# Altium PCB Range_Front.PcbDoc
Units mil, origin at the board's own origin, x right, y up, seen from the top; angles counter-clockwise.
Board outline 420 x 340 mil, 2 copper layers (Top Layer, Bottom Layer); 4 components, 6 nets, 22 pads, 2 vias.
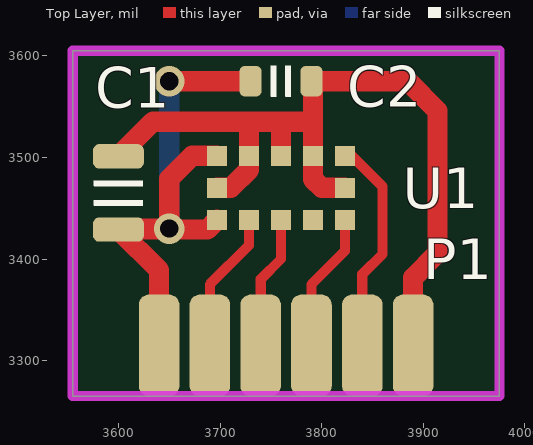
[diagram p0: Top Layer view]
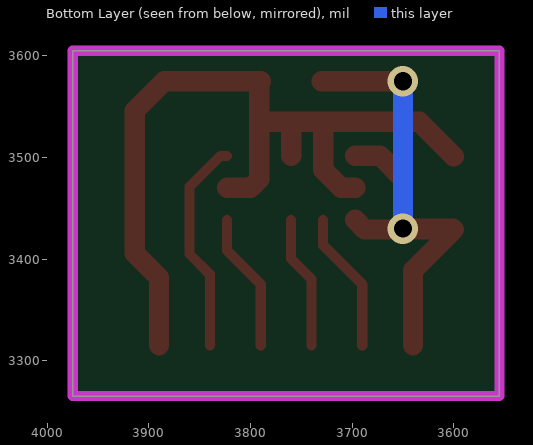
[diagram p1: Bottom Layer view, seen from below]

## Layer stack, top to bottom
Top Solder: solder mask 0.4, Solder Resist, Dk 3.5
Top Layer: signal copper 1.4
Dielectric 1: dielectric 12.6, FR-4, Dk 4.8
Bottom Layer: signal copper 1.4
Bottom Solder: solder mask 0.4, Solder Resist, Dk 3.5

## Board outline
3555,3265 3555,3605 3975,3605 3975,3265

## Design rules (kind name [scope] priority, off if disabled: settings)
Clearance Clearance_KeepOut [OnLayer('Keep-Out Layer')] p1: gap=8 ignorepadtopadclearanceinfootprint=TRUE except(0: Arc-SMDPad Arc-Hole Track-SMDPad Track-Hole SMDPad-Hole THPad-Hole Via-Hole Fill-Hole Poly-Hole Region-Hole Text-Hole)
Clearance [All] p2: gap=8 ignorepadtopadclearanceinfootprint=TRUE except(0: Arc-Hole Track-Hole SMDPad-Hole THPad-Hole Via-Hole Fill-Hole Poly-Hole Region-Hole Text-Hole)
ComponentClearance [All] p1: gap=8 collisioncheckmode=3 verticalgap=8 showdistances=FALSE
PolygonConnect [All] p1: connectstyle=Relief reliefconductorwidth=10 reliefentries=4 polygonreliefangle="90 Angle" airgapwidth=10
RoutingVias [All] p1: holewidth=18 width=30 viastyle="Through Hole" minholewidth=13 minwidth=20 maxholewidth=18 maxwidth=30
SolderMaskExpansion [All] p1: expansion=4
Width Width_VCC [InNet('VCC2.8V')] p1: maxlimit=30 minlimit=10 preferedwidth=20 minimp=50.000000 maximp=50.000000 favimp=50.000000
Width Width_GND [InNet('GND')] p2: maxlimit=30 minlimit=10 preferedwidth=20 minimp=50.000000 maximp=50.000000 favimp=50.000000
Width [All] p3: maxlimit=10 minlimit=10 preferedwidth=10
29 further rules are at their usual default settings.

## Components (designator, comment, footprint, x,y, rotation, side; value= is the part's Value field where it differs from the comment)
C1 "Cap_0805" CAP_0805 3600,3465 r270 top value=10uF
C2 "Cap_0603" CAP_0603 3760,3575 r180 top value=0.1uF
P1 "HDR1x6_1.27" HDR1X6_1.27_180H_SMD 3640,3315 r270 top
U1 "VL53L0X" LGA12_ST_4.4X2.4X1MM 3760,3470 r180 top

## Footprints (in the part's own frame and the unit in brackets; to place one, negate y for a bottom-side part, rotate by r counter-clockwise, add the part's x,y. Pads: shape width x height; smd on the part's side, far side on the other; paste and mask are expansions set on the pad)
CAP_0603 [mil]
  rrect50% 22x30 smd: 1(-30,0) 2(30,0)
  silkscreen extent -10,-15 10,15, body extent -31,-16 31,16, height 31
CAP_0805 [mil]
  rrect50% 24x50 smd: 1(-36,0) 2(36,0)
  silkscreen extent -12,-24 12,24, body extent -39,-25 39,25, height 39
HDR1X6_1.27_180H_SMD [mil]
  rrect50% 100x40 smd: 1(0,0) 2(0,50) 3(0,100) 4(0,150) 5(0,200) 6(0,250)
LGA12_ST_4.4X2.4X1MM [mil] "VL53L0X, LGA12 4.4X2.4X1MM"
  rect 19.69x19.69 smd: 1(62.99,-31.5) 2(31.5,-31.5) 3(0,-31.5) 4(-31.5,-31.5) 5(-62.99,-31.5) 6(-62.99,0) 7(-62.99,31.5) 8(-31.5,31.5) 9(0,31.5) 10(31.5,31.5) 11(62.99,31.5) 12(62.99,0)

## Part data
C1 C2: "Capacitor"
P1: "Header"
U1: "VL53L0X - Laser Time of Flight Sensor (2M range)", VDD="VDD:  / Op. Temp:"

## Via types
v1: diameter 30, hole 18, Top Layer to Bottom Layer, 2 vias

## Nets (pads, with @x,y where several pads share a name; then routed paths per layer and width w, separated by ;. In a path a pad name is that pad's centre, name@x,y a point inside that pad or via, vN(x,y) a via of type N, cw(c..) or ccw(c..) an arc to the next point about the centre after c; other vN are vias at no path point)
GND: C1.1 C2.1 P1.6 U1.2 U1.3 U1.4 U1.6 U1.12 | length 829.2
  Top Layer w20: C1.1 3634,3535 3725,3535 ; U1.12 3710.66,3470 3728.5,3487.84 U1.2 3728.5,3531.5 3725,3535 ; U1.3 3760,3535 ; 3785,3535 3760,3535 ; U1.6 3800,3470 3791.5,3478.5 U1.4 3791.5,3573.5 C2.1 3885,3575 3914,3546 3914,3405.77 3890,3381.77 P1.6 ; 3725,3535 3760,3535
GPIO_OUT: P1.4 U1.7 | length 137.2
  Top Layer w10: P1.4 3790,3375 3822.99,3407.99 U1.7
SCL_2.8V: P1.2 U1.10 | length 139.4
  Top Layer w10: P1.2 3690,3375 3728.5,3413.5 U1.10
SDA_2.8V: P1.3 U1.9 | length 131.8
  Top Layer w10: P1.3 3740,3380 3760,3400 U1.9
SHDN_2.8V: P1.5 U1.5 | length 214
  Top Layer w10: U1.5 3829.56,3501.5 3860,3471.06 3860,3405 3840,3385 P1.5
VCC2.8V: C1.2 C2.2 P1.1 U1.1 U1.11 | length 612.3
  Top Layer w20: P1.1 3640,3389 C1.2 ; v1(3650,3575) C2.2 ; U1.11 3687.51,3429 C1.2 ; U1.1 3672.5,3501.5 3650,3479 v1(3650,3430) 3601,3430 C1.2
  Bottom Layer w20: v1(3650,3430) v1(3650,3575)
pads on no net: U1.8

## Keep-outs
Keep-Out Layer:
  the board outline again, w10